# Allegro board HY_RF_TEST_V10_210708.brd
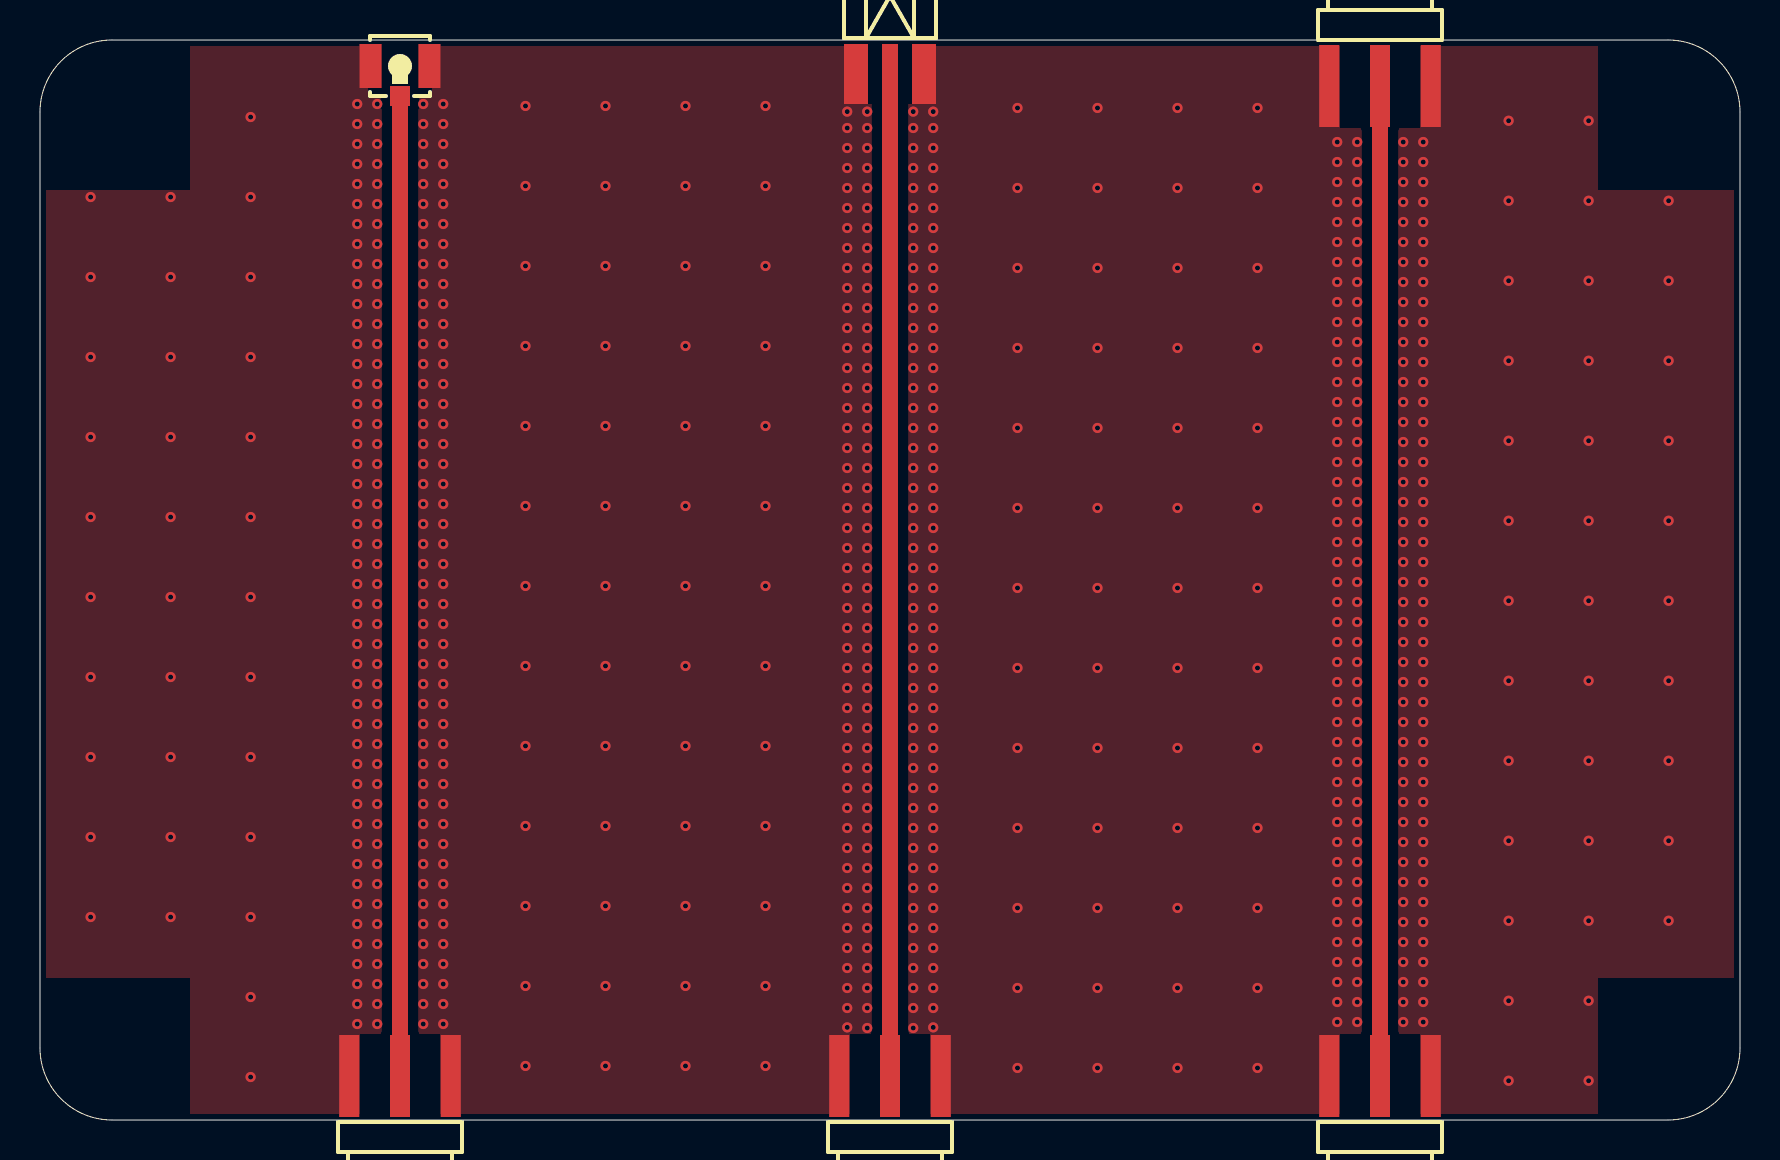
[diagram p0: board, top side]
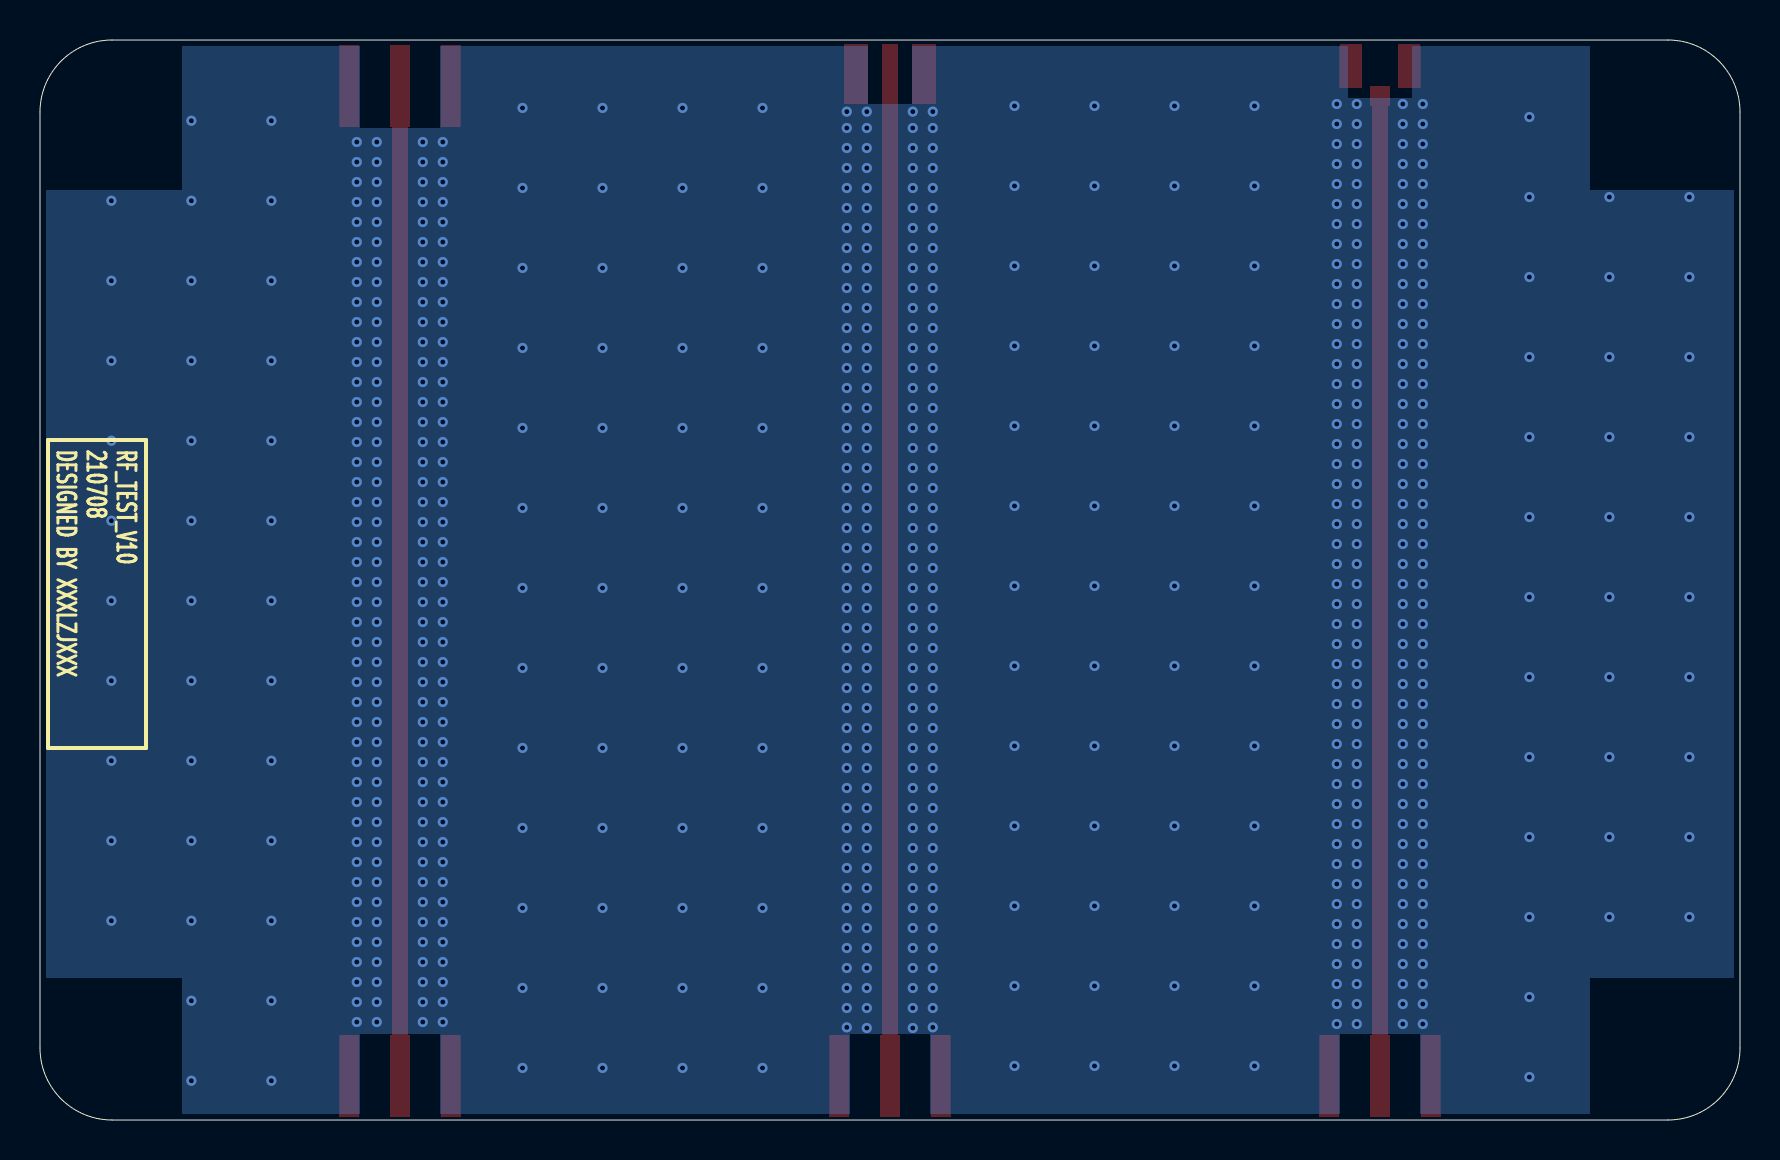
[diagram p1: board, bottom side, seen from below]

Outline 85 x 54 mm; copper layers: TOP, BOTTOM. Coordinates in mm from the lower left corner of the outline.
Outline path: 0,50.4 arc(1.05,52.95) 3.6,54 81.4,54 arc(83.95,52.95) 85,50.4 85,3.6 arc(83.95,1.05) 81.4,0 3.6,0 arc(1.05,1.05) 0,3.6 0,50.4

## Design rules (mm)
constraint set DEFAULT: min track width 0.203, pair gap 0.203

## Placement (name value [footprint] x y rotation side)
IPX1  U.FL-R-SMT-1(80)  [IPX3]  18 52.7 0 top
J1  -  [MMCX-KE-SMT]  42.5 52.3 270 top
J2  -  [SMA-KHD]  42.5 2.2 90 top
J3  -  [SMA-KHD]  67 51.7 270 top
J4  -  [SMA-KHD]  67 2.2 90 top
J5  -  [SMA-KHD]  18 2.2 90 top
NOREF  -  []  0 0 90 top
NOREF#2  -  []  0 0 0 top

## Library data of the parts
IPX1 = IPEX_0
J1 = MMCX-KE-SMT
J2-J5 = SMA-KHD

## Footprints (pads in the part's own frame, mm; a bottom-side part is the same pattern mirrored in y, then rotated)
IPX3
  rect 1x1 smd: 1(0,-1.501)
  rect 1.1x2.2 smd: 2(1.473,0) 3(-1.473,0)
MMCX-KE-SMT
  rect 3x1.2 smd: 1(0,1.7) 3(0,-1.7)
  rect 3x0.8 smd: 2(0,0)
SMA-KHD
  rect 4.1x1 smd: 1(0,2.54) 2(0,0) 3(0,-2.54)

## Nets
GND: IPX1.2 IPX1.3 J1.1 J1.3 J2.1 J2.3 J3.1 J3.3 J4.1 J4.3 J5.1 J5.3
RF1: J1.2 J2.2
RF2: J3.2 J4.2
RF3: IPX1.1 J5.2

## Via types
v1: diameter 0.508, hole 0.254, TOP to BOTTOM, 729 vias

## Routing (per net, layer and track width the routed paths; a pad name or vN(x,y) marks a point on that pad's centre or on a via; arc(x,y) is an arc through that point)
GND: length 0.7
  TOP w0.254: IPX1.3 16.2,52.7 ; IPX1.2 19.8,52.7
  vias: v1(2.53,46.15) v1(2.53,42.15) v1(2.53,38.15) v1(2.53,34.15) v1(2.53,30.15) v1(2.53,26.15) v1(2.53,22.15) v1(2.53,18.15) v1(2.53,14.15) v1(2.53,10.15) v1(6.53,46.15) v1(6.53,42.15) v1(6.53,38.15) v1(6.53,34.15) v1(6.53,30.15) v1(6.53,26.15) v1(6.53,22.15) v1(6.53,18.15) v1(6.53,14.15) v1(6.53,10.15) v1(10.53,50.15) v1(10.53,46.15) v1(10.53,42.15) v1(10.53,38.15) v1(10.53,34.15) v1(10.53,30.15) v1(10.53,26.15) v1(10.53,22.15) v1(10.53,18.15) v1(10.53,14.15) v1(10.53,10.15) v1(10.53,6.15) v1(10.53,2.15) v1(15.86,50.8) v1(15.86,49.8) v1(15.86,48.8) v1(15.86,47.8) v1(15.86,46.8) v1(15.86,45.8) v1(15.86,44.8) v1(15.86,43.8) v1(15.86,42.8) v1(15.86,41.8) v1(15.86,40.8) v1(15.86,39.8) v1(15.86,38.8) v1(15.86,37.8) v1(15.86,36.8) v1(15.86,35.8) v1(15.86,34.8) v1(15.86,33.8) v1(15.86,32.8) v1(15.86,31.8) v1(15.86,30.8) v1(15.86,29.8) v1(15.86,28.8) v1(15.86,27.8) v1(15.86,26.8) v1(15.86,25.8) v1(15.86,24.8) v1(15.86,23.8) v1(15.86,22.8) v1(15.86,21.8) v1(15.86,20.8) v1(15.86,19.8) v1(15.86,18.8) v1(15.86,17.8) v1(15.86,16.8) v1(15.86,15.8) v1(15.86,14.8) v1(15.86,13.8) v1(15.86,12.8) v1(15.86,11.8) v1(15.86,10.8) v1(15.86,9.8) v1(15.86,8.8) v1(15.86,7.8) v1(15.86,6.8) v1(15.86,5.8) v1(15.86,4.8) v1(16.86,50.8) v1(16.86,49.8) v1(16.86,48.8) v1(16.86,47.8) v1(16.86,46.8) v1(16.86,45.8) v1(16.86,44.8) v1(16.86,43.8) v1(16.86,42.8) v1(16.86,41.8) v1(16.86,40.8) v1(16.86,39.8) v1(16.86,38.8) v1(16.86,37.8) v1(16.86,36.8) v1(16.86,35.8) v1(16.86,34.8) v1(16.86,33.8) v1(16.86,32.8) v1(16.86,31.8) v1(16.86,30.8) v1(16.86,29.8) v1(16.86,28.8) v1(16.86,27.8) v1(16.86,26.8) v1(16.86,25.8) v1(16.86,24.8) v1(16.86,23.8) v1(16.86,22.8) v1(16.86,21.8) v1(16.86,20.8) v1(16.86,19.8) v1(16.86,18.8) v1(16.86,17.8) v1(16.86,16.8) v1(16.86,15.8) v1(16.86,14.8) v1(16.86,13.8) v1(16.86,12.8) v1(16.86,11.8) v1(16.86,10.8) v1(16.86,9.8) v1(16.86,8.8) v1(16.86,7.8) v1(16.86,6.8) v1(16.86,5.8) v1(16.86,4.8) v1(19.16,50.8) v1(19.16,49.8) v1(19.16,48.8) v1(19.16,47.8) v1(19.16,46.8) v1(19.16,45.8) v1(19.16,44.8) v1(19.16,43.8) v1(19.16,42.8) v1(19.16,41.8) v1(19.16,40.8) v1(19.16,39.8) v1(19.16,38.8) v1(19.16,37.8) v1(19.16,36.8) v1(19.16,35.8) v1(19.16,34.8) v1(19.16,33.8) v1(19.16,32.8) v1(19.16,31.8) v1(19.16,30.8) v1(19.16,29.8) v1(19.16,28.8) v1(19.16,27.8) v1(19.16,26.8) v1(19.16,25.8) v1(19.16,24.8) v1(19.16,23.8) v1(19.16,22.8) v1(19.16,21.8) v1(19.16,20.8) v1(19.16,19.8) v1(19.16,18.8) v1(19.16,17.8) v1(19.16,16.8) v1(19.16,15.8) v1(19.16,14.8) v1(19.16,13.8) v1(19.16,12.8) v1(19.16,11.8) v1(19.16,10.8) v1(19.16,9.8) v1(19.16,8.8) v1(19.16,7.8) v1(19.16,6.8) v1(19.16,5.8) v1(19.16,4.8) v1(20.16,50.8) v1(20.16,49.8) v1(20.16,48.8) v1(20.16,47.8) v1(20.16,46.8) v1(20.16,45.8) v1(20.16,44.8) v1(20.16,43.8) v1(20.16,42.8) v1(20.16,41.8) v1(20.16,40.8) v1(20.16,39.8) v1(20.16,38.8) v1(20.16,37.8) v1(20.16,36.8) v1(20.16,35.8) v1(20.16,34.8) v1(20.16,33.8) v1(20.16,32.8) v1(20.16,31.8) v1(20.16,30.8) v1(20.16,29.8) v1(20.16,28.8) v1(20.16,27.8) v1(20.16,26.8) v1(20.16,25.8) v1(20.16,24.8) v1(20.16,23.8) v1(20.16,22.8) v1(20.16,21.8) v1(20.16,20.8) v1(20.16,19.8) v1(20.16,18.8) v1(20.16,17.8) v1(20.16,16.8) v1(20.16,15.8) v1(20.16,14.8) v1(20.16,13.8) v1(20.16,12.8) v1(20.16,11.8) v1(20.16,10.8) v1(20.16,9.8) v1(20.16,8.8) v1(20.16,7.8) v1(20.16,6.8) v1(20.16,5.8) v1(20.16,4.8) v1(24.27,50.7) v1(24.27,46.7) v1(24.27,42.7) v1(24.27,38.7) v1(24.27,34.7) v1(24.27,30.7) v1(24.27,26.7) v1(24.27,22.7) v1(24.27,18.7) v1(24.27,14.7) v1(24.27,10.7) v1(24.27,6.7) v1(24.27,2.7) v1(28.27,50.7) v1(28.27,46.7) v1(28.27,42.7) v1(28.27,38.7) v1(28.27,34.7) v1(28.27,30.7) v1(28.27,26.7) v1(28.27,22.7) v1(28.27,18.7) v1(28.27,14.7) v1(28.27,10.7) v1(28.27,6.7) v1(28.27,2.7) v1(32.27,50.7) v1(32.27,46.7) v1(32.27,42.7) v1(32.27,38.7) v1(32.27,34.7) v1(32.27,30.7) v1(32.27,26.7) v1(32.27,22.7) v1(32.27,18.7) v1(32.27,14.7) v1(32.27,10.7) v1(32.27,6.7) v1(32.27,2.7) v1(36.27,50.7) v1(36.27,46.7) v1(36.27,42.7) v1(36.27,38.7) v1(36.27,34.7) v1(36.27,30.7) v1(36.27,26.7) v1(36.27,22.7) v1(36.27,18.7) v1(36.27,14.7) v1(36.27,10.7) v1(36.27,6.7) v1(36.27,2.7) v1(40.36,50.42) v1(40.36,49.6) v1(40.36,48.6) v1(40.36,47.6) v1(40.36,46.6) v1(40.36,45.6) v1(40.36,44.6) v1(40.36,43.6) v1(40.36,42.6) v1(40.36,41.6) v1(40.36,40.6) v1(40.36,39.6) v1(40.36,38.6) v1(40.36,37.6) v1(40.36,36.6) v1(40.36,35.6) v1(40.36,34.6) v1(40.36,33.6) v1(40.36,32.6) v1(40.36,31.6) v1(40.36,30.6) v1(40.36,29.6) v1(40.36,28.6) v1(40.36,27.6) v1(40.36,26.6) v1(40.36,25.6) v1(40.36,24.6) v1(40.36,23.6) v1(40.36,22.6) v1(40.36,21.6) v1(40.36,20.6) v1(40.36,19.6) v1(40.36,18.6) v1(40.36,17.6) v1(40.36,16.6) v1(40.36,15.6) v1(40.36,14.6) v1(40.36,13.6) v1(40.36,12.6) v1(40.36,11.6) v1(40.36,10.6) v1(40.36,9.6) v1(40.36,8.6) v1(40.36,7.6) v1(40.36,6.6) v1(40.36,5.6) v1(40.36,4.63) v1(41.36,50.42) v1(41.36,49.6) v1(41.36,48.6) v1(41.36,47.6) v1(41.36,46.6) v1(41.36,45.6) v1(41.36,44.6) v1(41.36,43.6) v1(41.36,42.6) v1(41.36,41.6) v1(41.36,40.6) v1(41.36,39.6) v1(41.36,38.6) v1(41.36,37.6) v1(41.36,36.6) v1(41.36,35.6) v1(41.36,34.6) v1(41.36,33.6) v1(41.36,32.6) v1(41.36,31.6) v1(41.36,30.6) v1(41.36,29.6) v1(41.36,28.6) v1(41.36,27.6) v1(41.36,26.6) v1(41.36,25.6) v1(41.36,24.6) v1(41.36,23.6) v1(41.36,22.6) v1(41.36,21.6) v1(41.36,20.6) v1(41.36,19.6) v1(41.36,18.6) v1(41.36,17.6) v1(41.36,16.6) v1(41.36,15.6) v1(41.36,14.6) v1(41.36,13.6) v1(41.36,12.6) v1(41.36,11.6) v1(41.36,10.6) v1(41.36,9.6) v1(41.36,8.6) v1(41.36,7.6) v1(41.36,6.6) v1(41.36,5.6) v1(41.36,4.6) v1(43.66,50.42) v1(43.66,49.6) v1(43.66,48.6) v1(43.66,47.6) v1(43.66,46.6) v1(43.66,45.6) v1(43.66,44.6) v1(43.66,43.6) v1(43.66,42.6) v1(43.66,41.6) v1(43.66,40.6) v1(43.66,39.6) v1(43.66,38.6) v1(43.66,37.6) v1(43.66,36.6) v1(43.66,35.6) v1(43.66,34.6) v1(43.66,33.6) v1(43.66,32.6) v1(43.66,31.6) v1(43.66,30.6) v1(43.66,29.6) v1(43.66,28.6) v1(43.66,27.6) v1(43.66,26.6) v1(43.66,25.6) v1(43.66,24.6) v1(43.66,23.6) v1(43.66,22.6) v1(43.66,21.6) v1(43.66,20.6) v1(43.66,19.6) v1(43.66,18.6) v1(43.66,17.6) v1(43.66,16.6) v1(43.66,15.6) v1(43.66,14.6) v1(43.66,13.6) v1(43.66,12.6) v1(43.66,11.6) v1(43.66,10.6) v1(43.66,9.6) v1(43.66,8.6) v1(43.66,7.6) v1(43.66,6.6) v1(43.66,5.6) v1(43.66,4.6) v1(44.66,50.42) v1(44.66,49.6) v1(44.66,48.6) v1(44.66,47.6) v1(44.66,46.6) v1(44.66,45.6) v1(44.66,44.6) v1(44.66,43.6) v1(44.66,42.6) v1(44.66,41.6) v1(44.66,40.6) v1(44.66,39.6) v1(44.66,38.6) v1(44.66,37.6) v1(44.66,36.6) v1(44.66,35.6) v1(44.66,34.6) v1(44.66,33.6) v1(44.66,32.6) v1(44.66,31.6) v1(44.66,30.6) v1(44.66,29.6) v1(44.66,28.6) v1(44.66,27.6) v1(44.66,26.6) v1(44.66,25.6) v1(44.66,24.6) v1(44.66,23.6) v1(44.66,22.6) v1(44.66,21.6) v1(44.66,20.6) v1(44.66,19.6) v1(44.66,18.6) v1(44.66,17.6) v1(44.66,16.6) v1(44.66,15.6) v1(44.66,14.6) v1(44.66,13.6) v1(44.66,12.6) v1(44.66,11.6) v1(44.66,10.6) v1(44.66,9.6) v1(44.66,8.6) v1(44.66,7.6) v1(44.66,6.6) v1(44.66,5.6) v1(44.66,4.63) v1(48.87,50.6) v1(48.87,46.6) v1(48.87,42.6) v1(48.87,38.6) v1(48.87,34.6) v1(48.87,30.6) v1(48.87,26.6) v1(48.87,22.6) v1(48.87,18.6) v1(48.87,14.6) v1(48.87,10.6) v1(48.87,6.6) v1(48.87,2.6) v1(52.87,50.6) v1(52.87,46.6) v1(52.87,42.6) v1(52.87,38.6) v1(52.87,34.6) v1(52.87,30.6) v1(52.87,26.6) v1(52.87,22.6) v1(52.87,18.6) v1(52.87,14.6) v1(52.87,10.6) v1(52.87,6.6) v1(52.87,2.6) v1(56.87,50.6) v1(56.87,46.6) v1(56.87,42.6) v1(56.87,38.6) v1(56.87,34.6) v1(56.87,30.6) v1(56.87,26.6) v1(56.87,22.6) v1(56.87,18.6) v1(56.87,14.6) v1(56.87,10.6) v1(56.87,6.6) v1(56.87,2.6) v1(60.87,50.6) v1(60.87,46.6) v1(60.87,42.6) v1(60.87,38.6) v1(60.87,34.6) v1(60.87,30.6) v1(60.87,26.6) v1(60.87,22.6) v1(60.87,18.6) v1(60.87,14.6) v1(60.87,10.6) v1(60.87,6.6) v1(60.87,2.6) v1(64.86,48.9) v1(64.86,47.9) v1(64.86,46.9) v1(64.86,45.9) v1(64.86,44.9) v1(64.86,43.9) v1(64.86,42.9) v1(64.86,41.9) v1(64.86,40.9) v1(64.86,39.9) v1(64.86,38.9) v1(64.86,37.9) v1(64.86,36.9) v1(64.86,35.9) v1(64.86,34.9) v1(64.86,33.9) v1(64.86,32.9) v1(64.86,31.9) v1(64.86,30.9) v1(64.86,29.9) v1(64.86,28.9) v1(64.86,27.9) v1(64.86,26.9) v1(64.86,25.9) v1(64.86,24.9) v1(64.86,23.9) v1(64.86,22.9) v1(64.86,21.9) v1(64.86,20.9) v1(64.86,19.9) v1(64.86,18.9) v1(64.86,17.9) v1(64.86,16.9) v1(64.86,15.9) v1(64.86,14.9) v1(64.86,13.9) v1(64.86,12.9) v1(64.86,11.9) v1(64.86,10.9) v1(64.86,9.9) v1(64.86,8.9) v1(64.86,7.9) v1(64.86,6.9) v1(64.86,5.9) v1(64.86,4.9) v1(65.86,48.9) v1(65.86,47.9) v1(65.86,46.9) v1(65.86,45.9) v1(65.86,44.9) v1(65.86,43.9) v1(65.86,42.9) v1(65.86,41.9) v1(65.86,40.9) v1(65.86,39.9) v1(65.86,38.9) v1(65.86,37.9) v1(65.86,36.9) v1(65.86,35.9) v1(65.86,34.9) v1(65.86,33.9) v1(65.86,32.9) v1(65.86,31.9) v1(65.86,30.9) v1(65.86,29.9) v1(65.86,28.9) v1(65.86,27.9) v1(65.86,26.9) v1(65.86,25.9) v1(65.86,24.9) v1(65.86,23.9) v1(65.86,22.9) v1(65.86,21.9) v1(65.86,20.9) v1(65.86,19.9) v1(65.86,18.9) v1(65.86,17.9) v1(65.86,16.9) v1(65.86,15.9) v1(65.86,14.9) v1(65.86,13.9) v1(65.86,12.9) v1(65.86,11.9) v1(65.86,10.9) v1(65.86,9.9) v1(65.86,8.9) v1(65.86,7.9) v1(65.86,6.9) v1(65.86,5.9) v1(65.86,4.9) v1(68.16,48.9) v1(68.16,47.9) v1(68.16,46.9) v1(68.16,45.9) v1(68.16,44.9) v1(68.16,43.9) v1(68.16,42.9) v1(68.16,41.9) v1(68.16,40.9) v1(68.16,39.9) v1(68.16,38.9) v1(68.16,37.9) v1(68.16,36.9) v1(68.16,35.9) v1(68.16,34.9) v1(68.16,33.9) v1(68.16,32.9) v1(68.16,31.9) v1(68.16,30.9) v1(68.16,29.9) v1(68.16,28.9) v1(68.16,27.9) v1(68.16,26.9) v1(68.16,25.9) v1(68.16,24.9) v1(68.16,23.9) v1(68.16,22.9) v1(68.16,21.9) v1(68.16,20.9) v1(68.16,19.9) v1(68.16,18.9) v1(68.16,17.9) v1(68.16,16.9) v1(68.16,15.9) v1(68.16,14.9) v1(68.16,13.9) v1(68.16,12.9) v1(68.16,11.9) v1(68.16,10.9) v1(68.16,9.9) v1(68.16,8.9) v1(68.16,7.9) v1(68.16,6.9) v1(68.16,5.9) v1(68.16,4.9) v1(69.16,48.9) v1(69.16,47.9) v1(69.16,46.9) v1(69.16,45.9) v1(69.16,44.9) v1(69.16,43.9) v1(69.16,42.9) v1(69.16,41.9) v1(69.16,40.9) v1(69.16,39.9) v1(69.16,38.9) v1(69.16,37.9) v1(69.16,36.9) v1(69.16,35.9) v1(69.16,34.9) v1(69.16,33.9) v1(69.16,32.9) v1(69.16,31.9) v1(69.16,30.9) v1(69.16,29.9) v1(69.16,28.9) v1(69.16,27.9) v1(69.16,26.9) v1(69.16,25.9) v1(69.16,24.9) v1(69.16,23.9) v1(69.16,22.9) v1(69.16,21.9) v1(69.16,20.9) v1(69.16,19.9) v1(69.16,18.9) v1(69.16,17.9) v1(69.16,16.9) v1(69.16,15.9) v1(69.16,14.9) v1(69.16,13.9) v1(69.16,12.9) v1(69.16,11.9) v1(69.16,10.9) v1(69.16,9.9) v1(69.16,8.9) v1(69.16,7.9) v1(69.16,6.9) v1(69.16,5.9) v1(69.16,4.9) v1(73.43,49.96) v1(73.43,45.96) v1(73.43,41.96) v1(73.43,37.96) v1(73.43,33.96) v1(73.43,29.96) v1(73.43,25.96) v1(73.43,21.96) v1(73.43,17.96) v1(73.43,13.96) v1(73.43,9.96) v1(73.43,5.96) v1(73.43,1.96) v1(77.43,49.96) v1(77.43,45.96) v1(77.43,41.96) v1(77.43,37.96) v1(77.43,33.96) v1(77.43,29.96) v1(77.43,25.96) v1(77.43,21.96) v1(77.43,17.96) v1(77.43,13.96) v1(77.43,9.96) v1(77.43,5.96) v1(77.43,1.96) v1(81.43,45.96) v1(81.43,41.96) v1(81.43,37.96) v1(81.43,33.96) v1(81.43,29.96) v1(81.43,25.96) v1(81.43,21.96) v1(81.43,17.96) v1(81.43,13.96) v1(81.43,9.96)
RF1: length 50.1
  TOP w0.8: J1.2 J2.2
RF2: length 49.5
  TOP w0.8: J3.2 J4.2
RF3: length 49
  TOP w0.8: IPX1.1 J5.2

## Copper pours and planes (outline as drawn; the poured copper is in the pictures)
GND on TOP, BOTTOM: 69,53.7 81.4,53.7 83.73,52.73 84.7,50.4 84.7,3.6 83.73,1.27 81.4,0.3 69,0.3 69,4.3 65,4.3 65,0.3 44.5,0.3 44.5,4.3 40.5,4.3 40.5,0.3 20,0.3 20,4.3 16,4.3 16,0.3 3.6,0.3 1.27,1.27 0.3,3.6 0.3,50.4 1.27,52.73 3.6,53.7 16.4,53.7 16.4,51.1 19.6,51.1 19.6,53.7 41.4,53.7 41.4,50.8 43.6,50.8 43.6,53.7 65,53.7 65,49.6 69,49.6

## Text on the board
Ref Des/Silkscreen Bottom: RF_TEST_V10 | 210708 | DESIGNED BY XXXLZJXXX
DIMENSION: FIGURE | FINISHED_SIZE | 0.254 | DRILL CHART: TOP to BOTTOM | ALL UNITS ARE IN MILLIMETERS | PLATED | QTY | 729 | TOTAL HOLES:
